# Altium PCB Keo_truot_cua_tu_6_sensor_1_PCB.PcbDoc
Units mil, origin at the board's own origin, x right, y up, seen from the top; angles counter-clockwise.
Board outline 3523.81 x 1301.37 mil, 2 copper layers (Top Layer, Bottom Layer); 37 components, 15 nets, 110 pads, 87 vias.
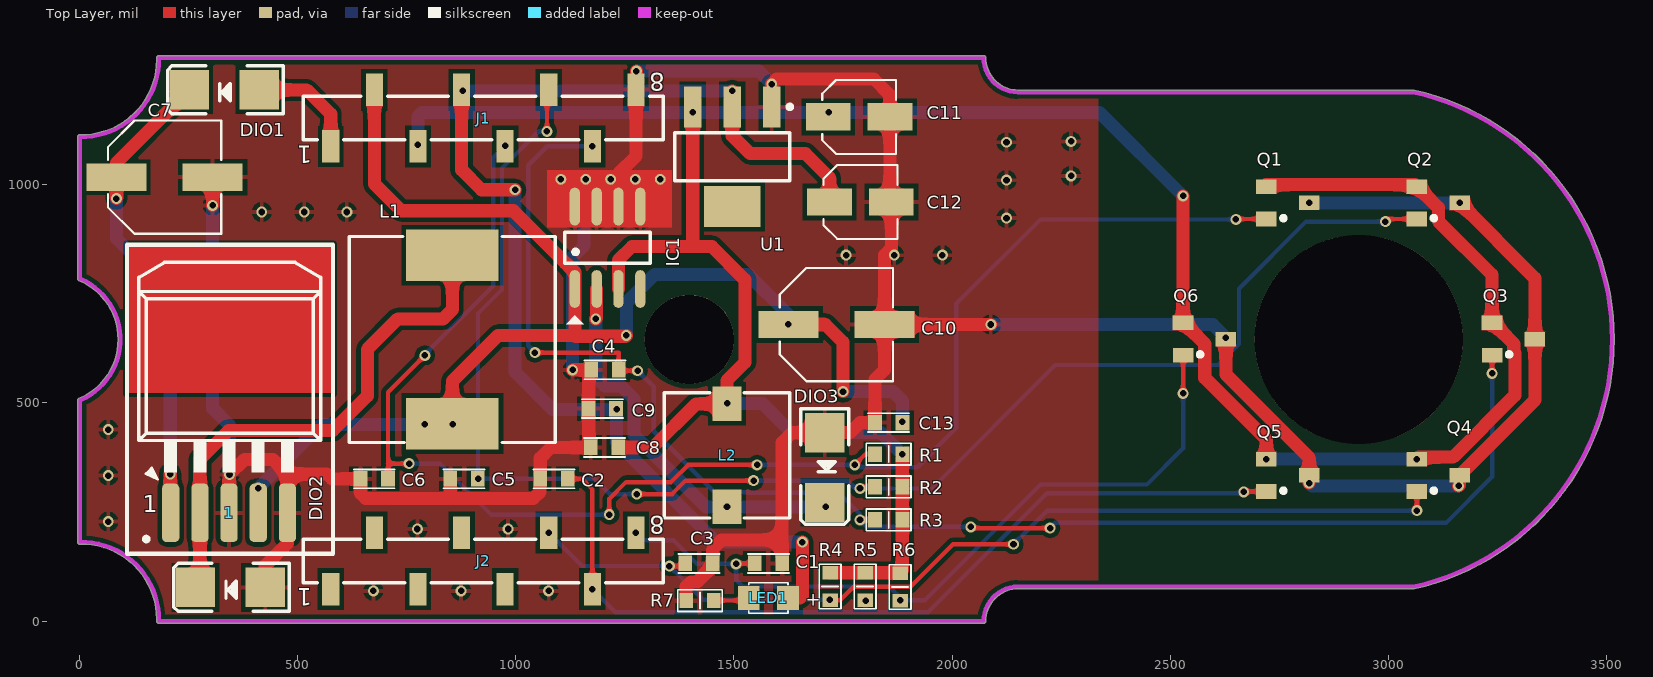
[diagram p0: Top Layer view]
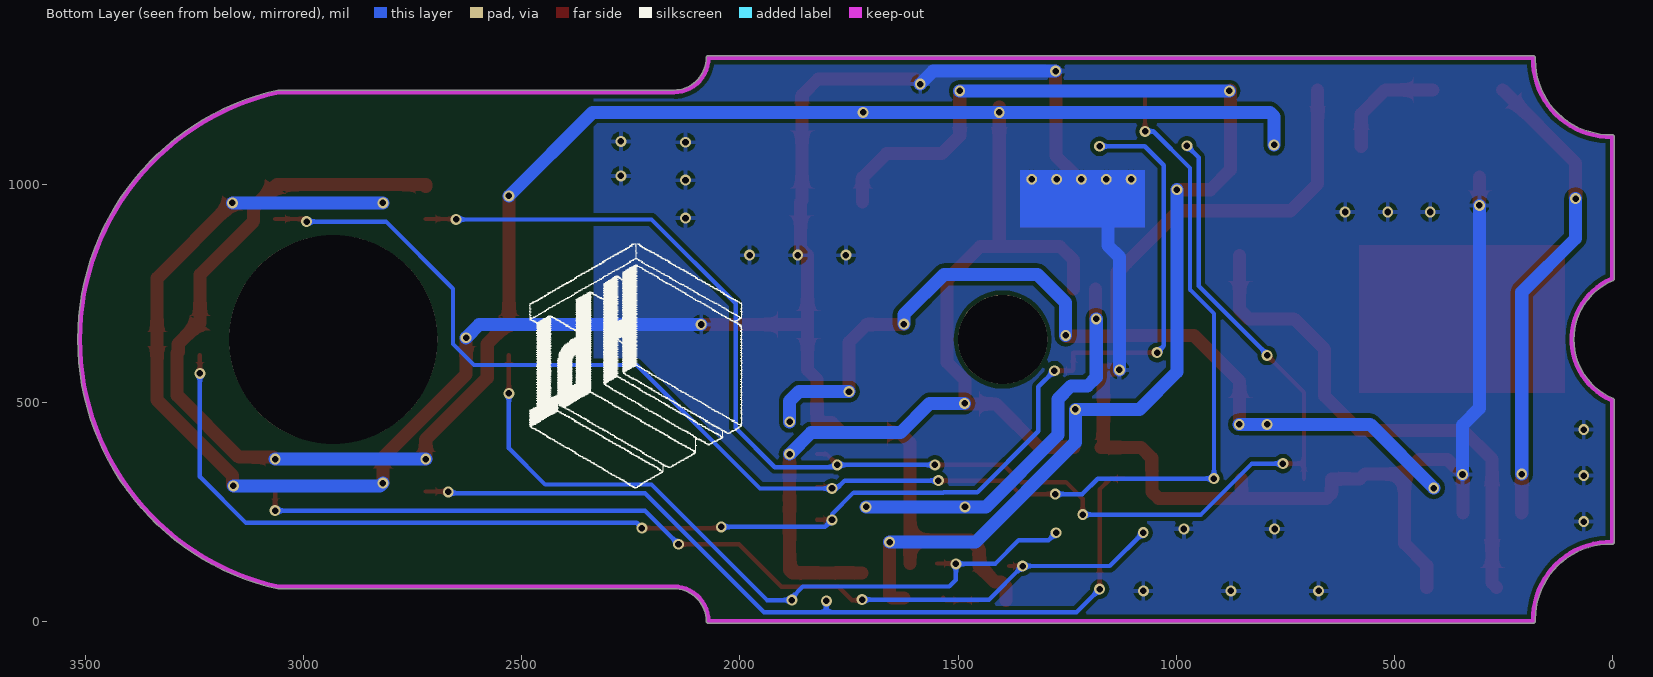
[diagram p1: Bottom Layer view, seen from below]
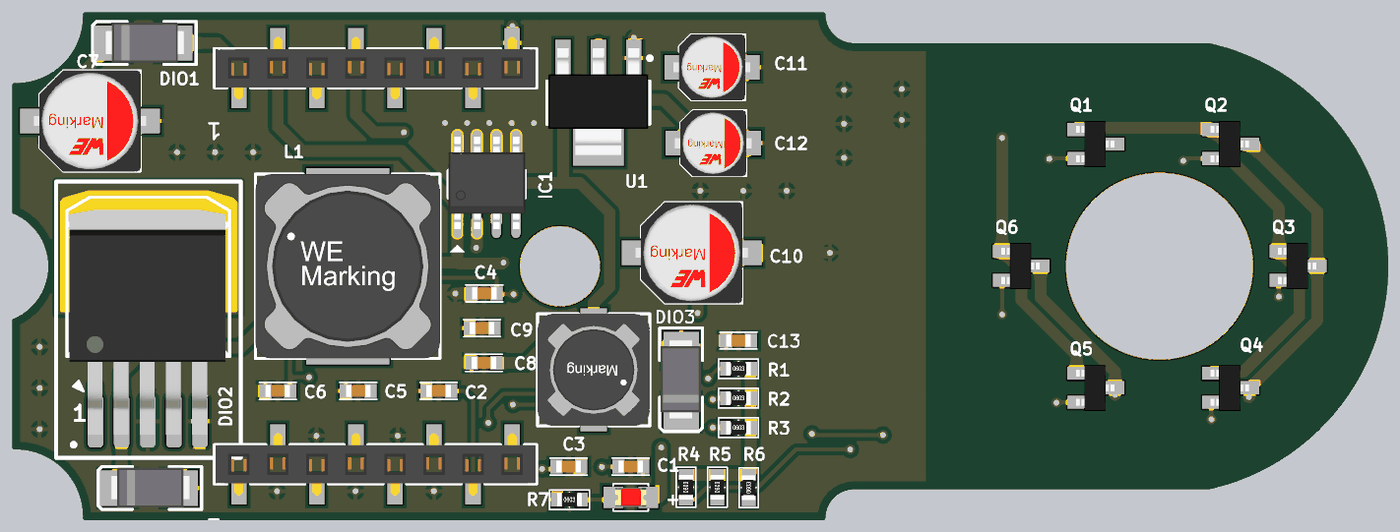
[diagram p2: 3D render of the assembled board from above, using the file's embedded part models]

## Layer stack, top to bottom
Top Solder: solder mask 0.4, Solder Resist, Dk 3.5
Top Layer: signal copper 1.4
Dielectric 1: dielectric 12.6, FR-4, Dk 4.8
Bottom Layer: signal copper 1.4
Bottom Solder: solder mask 0.4, Solder Resist, Dk 3.5

## Board outline
-5.02,181.06 -5.02,506.07 cw(c0,506.07) -1.93,510.7 ccw(c-59.06,645.67) 87.5,645.67 ccw(c-59.06,645.67) -1.93,780.64 cw(c0,785.27) -5.02,785.27 -5.02,1110.28 cw(c0,1110.28) 0.11,1115.29 ccw(c3.94,1287.4) 176.09,1287.4 ccw(c3.94,1287.4) 176.04,1291.23 cw(c181.06,1291.34) 181.06,1296.35 2072.64,1296.35 cw(c2072.64,1291.34) 2077.65,1291.34 ccw(c2151.38,1291.34) 2151.38,1217.61 3058.79,1217.61 cw(c3058.82,1212.6) 3059.91,1217.49 cw(c2933.07,645.67) 3518.79,645.67 cw(c2933.07,645.67) 3059.91,73.84 cw(c3058.82,78.74) 3058.79,73.72 2151.38,73.72 ccw(c2151.38,0) 2077.65,0 cw(c2072.64,0) 2072.64,-5.02 181.06,-5.02 cw(c181.06,0) 176.04,0.11 ccw(c3.94,3.94) 176.09,3.94 ccw(c3.94,3.94) 0.11,176.04 cw(c0,181.06)

## Design rules (kind name [scope] priority, off if disabled: settings)
Clearance [All] p1: gap=10
PolygonConnect [All] p1: connectstyle=Relief reliefconductorwidth=10 reliefentries=4 polygonreliefangle="90 Angle" airgapwidth=10
RoomDefinition Keo_truot_cua_tu_6_sensor_1_schematic [InComponentClass('Keo_truot_cua_tu_6_sensor_1_schematic')] p1: confinementstyle=ConfineIn formatcopy=TRUE lockcomponents=FALSE outline 3546.89,61.52 12001.89,61.52 12001.89,1021.52 3546.89,1021.52
RoutingVias [All] p1: holewidth=15 width=25 viastyle="Through Hole" minholewidth=15 minwidth=25 maxholewidth=28 maxwidth=100
SolderMaskExpansion [All] p1: expansion=4
Width [All] p1: maxlimit=80 minlimit=10 preferedwidth=10
30 further rules are at their usual default settings.

## Components (designator, comment, footprint, x,y, rotation, side; value= is the part's Value field where it differs from the comment)
1 "LM2576" TO263 327,483 r0 top
C1 "104 16V" CAP_0603 1579,132 r180 top
C2 "104 16V" CAP_0603 1087,326 r0 top
C3 "104 16V" CAP_0603 1420,132 r180 top
C4 "104 16V" CAP_0603 1204,576 r0 top
C5 "104 16V" CAP_0603 881,326 r0 top
C6 "104 16V" CAP_0603 675,326 r0 top
C7 "10uF 50V" CAP-ALU-SMD-6.3x7.7x2.2 194,1018 r0 top
C8 "104 16V" CAP_0603 1203,398 r0 top
C9 "104 16V" CAP_0603 1198,487 r0 top
C10 "470uF" CAP-ALU-SMD-6.3x7.7x2.2 1735,680 r0 top
C11 "10uF 16V" CAP-ALU-SMD-4.5x5x1.4 1787,1156 r0 top
C12 "10uF 16V" CAP-ALU-SMD-4.5x5x1.4 1790,961 r0 top
C13 "104 16V" CAP_0603 1854.82,455 r0 top
DIO1 "SS34" DIO-SMD-106 331,1218 r0 top
DIO2 "SS34" DIO-SMD-106 345,77 r0 top
DIO3 "SS34" DIO-SMD-106 1708,352 r90 top
IC1 "xl1509-5V" SO-8 1210,856 r90 top
J1 "61000813321" 61000813321 925.2,1153.54 r180 top
J2 "61000813321" 61000813321 925.2,137.8 r180 top
L1 "100uH" L-SMD-M-12x10 854,645.67 r0 top
L2 "220uH" L-SMD-M-7.3x4.5 1484,380 r0 top
LED1 "LED" LED-0805-Red 1624,53 r180 top
Q1 "DRV5023BI" SOT23B 2770,959 r270 top
Q2 "DRV5023BI" SOT23B 3115,959 r270 top
Q3 "DRV5023BI" SOT23B 3287.72,646.5 r270 top
Q4 "DRV5023BI" SOT23B 3115,334 r270 top
Q5 "DRV5023BI" SOT23B 2770,334 r270 top
Q6 "DRV5023BI" SOT23B 2579.06,646.5 r270 top
R1 "10K" RES_0603 1854.82,382.9 r0 top
R2 "10K" RES_0603 1854.82,307.45 r0 top
R3 "10K" RES_0603 1854.82,232 r0 top
R4 "10K" RES_0603 1720.4,79 r90 top
R5 "10K" RES_0603 1800.7,79 r90 top
R6 "10K" RES_0603 1881,78 r90 top
R7 "1K" RES_0603 1421.91,47 r0 top
U1 "LM1117-3.3V" SOT223 1496,1065 r180 top

## Footprints (in the part's own frame and the unit in brackets; to place one, negate y for a bottom-side part, rotate by r counter-clockwise, add the part's x,y. Pads: shape width x height; smd on the part's side, far side on the other; paste and mask are expansions set on the pad)
61000813321 [mm] "Socket Header, Pitch 2.54 mm, SMT, Vertical, single row, 8p"
  rect 1x1.91 smd: 1(8.89,1.645) 2(6.35,-1.645) 3(3.81,1.645) 4(1.27,-1.645) 5(-1.27,1.645) 6(-3.81,-1.645) 7(-6.35,1.645) 8(-8.89,-1.645)
  silkscreen extent -10.49,-1.28 10.49,1.28, body extent -10.41,-2.03 10.41,2.02, height 7.5
CAP-ALU-SMD-4.5x5x1.4 [mm]
  rect 2.6x1.6 smd: 1(-1.8,0) 2(1.8,0)
  silkscreen extent -2.15,-2.15 2.15,2.15, body extent -2.5,-2.15 2.5,2.15, height 5.45
CAP-ALU-SMD-6.3x7.7x2.2 [mm]
  rect 3.5x1.6 smd: 1(-2.8,0) 2(2.8,0)
  silkscreen extent -3.3,-3.3 3.3,3.3, body extent -3.65,-3.3 3.65,3.3, height 7.65
CAP_0603 [mm]
  rect 0.8x0.9 smd: 1(-0.8,0) 2(0.8,0)
  silkscreen extent -1.2,-0.55 1.2,0.55, body extent -0.8,-0.4 0.8,0.4, height 0.9
DIO-SMD-106 [mil]
  rect 90x90.55 smd: 1(80,0) 2(-80,0)
  silkscreen extent -130,-55 135,55, body extent -99,-50 106,52, height 95
L-SMD-M-7.3x4.5 [mm] "WE-PDA SMD Shielded Power Inductor, 7345"
  rect 1.7x2 smd: 1(0,3) 2(0,-3)
  silkscreen extent -3.65,-3.65 3.65,3.65, body extent -3.65,-3.65 3.65,3.65, height 4.05
L-SMD-M-12x10 [mm] "WE-PDA SMD Shielded Power Inductor, 1210"
  rect 5.4x3 smd: 1(0,4.9) 2(0,-4.9)
  silkscreen extent -6,-6 6,6, body extent -6,-6 6,6, height 9.7
LED-0805-Red [mil]
  rect 50x55 smd: 1(0,0) 2(90,0)
  silkscreen extent 0,-35 90,35, body extent 5,-25 85,25, height 43
RES_0603 [mm]
  rect 0.8x0.9 smd: 1(-0.8,0) 2(0.8,0)
  silkscreen extent -1.3,-0.64 1.3,0.64, body extent -0.8,-0.45 0.8,0.45, height 0.5
SO-8 [mm] "8-Pin Small Outline Integrated Circuit 1.27 mm Pitch, IPC Medium Density"
  oval 2.2x0.6 smd: 1(-2.4,1.905) 2(-2.4,0.635) 3(-2.4,-0.635) 4(-2.4,-1.905) 5(2.4,-1.905) 6(2.4,-0.635) 7(2.4,0.635) 8(2.4,1.905)
  silkscreen extent -4.44,-2.5 0.9,2.5, body extent -2.93,-2.51 3.08,2.49, height 1.75
SOT23B [mm] "SOT 23B"
  rect 0.85x1.2 smd: 1(0.94,-1.245) 2(0,1.25) 3(-0.95,-1.25)
  silkscreen extent 0.77,-0.38 1.02,-0.13, body extent -1.5,-1.3 1.5,1.2, height 1.06
SOT223 [mm]
  rect 1x2.4 smd: 1(-2.3,-2.9) 2(0,-2.9) 3(2.3,-2.9)
  rect 3.3x2.4 smd: 4(0,2.9)
  silkscreen extent -3.48,-3.02 3.35,1.4, body extent -3.25,-3.56 3.25,3.4, height 1.68
TO263 [mm]
  rrect50% 1x3.4 smd: 1(-3.019,-5.969) 2(-1.319,-5.969) 4(2.081,-5.969) 5(3.781,-5.969)
  rrect50% 1x3.4 smd mask+0: 3(0.381,-5.969)
  Top Layer region: -5.568,1.016 6.432,1.016 6.432,9.65 -5.568,9.65
  silkscreen extent -5.57,-8.35 6.43,9.65, body extent -4.73,-6.84 5.43,7.8, height 4.57

## Part data
C1 C2 C3 C4 C5 C6 C8 C9 C13: library part "Capacitor SMD", "Capacitor SMD"
C7 C10 C11 C12: library part CN-ALU-SMD, "Polarized Capacitor (Axial)"
DIO1 DIO2 DIO3: library part "Diode SMD", "Default Diode"
IC1: library part LS1240A, "Electronic Two-Tone Ringer"
J1 J2: "SMT Vertical Socket Header WR-PHD, Pitch 2.54 mm, Single Row, 8 pins"
L1 L2: library part L-SMD-1
LED1: library part "LED SMD"
Q1 Q2 Q3 Q4 Q5 Q6: library part C1815, "hall sensor"
R1 R2 R3 R4 R5 R6 R7: library part "Resistor SMD", "Resistor SMD"
U1: library part LM1117, "800mA Low-Dropout Linear Regulator"

## Free pads (board coordinates)
  round 204.72 hole 204.72: 2(1397.64,645.67)
  round 478.35 hole 478.35: 5(2933.07,645.67)
  round 25 hole 15: 13(1103,1013) 14(1160,1013) 15(1217,1013) 16(1274,1013) 17(1331,1013)

## Via types
v1: diameter 25, hole 15, Top Layer to Bottom Layer, tented both sides, 87 vias

## Nets (pads, with @x,y where several pads share a name; then routed paths per layer and width w, separated by ;. In a path a pad name is that pad's centre, name@x,y a point inside that pad or via, vN(x,y) a via of type N, cw(c..) or ccw(c..) an arc to the next point about the centre after c; other vN are vias at no path point)
3.3V: C9.2 C12.1 J1.4 LED1.1 U1.2 | length 2805.8
  Top Layer w30: J1.4 875.2,1034.8 921,989 v1(998,989) ; v1(1496,1216) U1.2 1496,1113 1537,1072 1664,1072 1719.13,1016.87 C12.1 ; LED1.1 1651,53 1657,59 v1(1657,181)
  Bottom Layer w30: v1(877.5,1216) v1(1496,1216) ; v1(998,989) 998,571 1083.5,485.5 v1(1231,485.5) 1231,410 1460,181 v1(1657,181)
5V: C8.2 C11.1 IC1.3 J1.3 L2.1 Q1.3 Q2.3 Q3.3 Q4.3 Q5.3 Q6.3 R1.2 R2.2 R3.2 R4.2 R5.2 R6.2 U1.3 | length 6339.7
  Top Layer w30: C8.2 1313,398 1413.11,498.11 L2.1 ; IC1.3 1235,828 1266,859 1405,859 ; U1.3 v1(1405.45,1166.55) 1405.45,859.45 1405,859 ; L2.1@1484,499 1484,551.91 1525,592.91 1525,783 1449,859 1405,859 ; R4.2 R5.2 1880,110.5 1886.32,116.81 R3.2 R2.2 v1(1886.32,382.9) ; v1(2529.84,974.84) Q6.3 2531.36,683.9 2579.65,635.62 2579.65,557.79 2720.79,416.64 v1(2720.79,371.4) ; Q1.3 2720.79,1000.73 3061.46,1000.73 Q2.3 3067.31,996.4 3115.59,948.12 3115.59,917.27 3238.5,794.36 Q3.3 3240.02,683.9 3288.31,635.62 3288.31,616.72 3291,614.03 3291,517.36 3149.38,375.73 3070.12,375.73 v1(3065.79,371.4)
  Bottom Layer w30: v1(775,1092) 775,1157 784.55,1166.55 v1(1405.45,1166.55) v1(1717.45,1166.55) 2338.13,1166.55 v1(2529.84,974.84) ; v1(1485,499) 1565,499 1632,432 1837.21,432 v1(1886.32,382.9) ; v1(2720.79,371.4) v1(3065.79,371.4)
12V: 1.4 C10.1 C13.2 IC1.1 J1.2 L1.2 | length 2933.8
  Top Layer w30: J1.2 675.2,1002.8 737,941 994,941 1135,800 IC1.1 1135,655 ; L1.2 854,550 959,655 1135,655 ; v1(1253,655) 1251,653 1137,653 1135,655 ; C10.1 1709.49,680 1750,639.49 v1(1750,526)
  Bottom Layer w30: v1(408.93,304.93) 555,451 v1(791,451) v1(855,451) ; v1(1253,655) 1253,730 1318,795 1532,795 1624,703 v1(1624,680.76) ; v1(1750,526) 1865,526 1886,505 v1(1886,457)
24V: DIO1.1 J1.1 | length 261.1
  Top Layer w30: DIO1.1 520,1218 575.2,1162.8 J1.1
GND: 1.3 1.5 C1.1 C2.1 C3.1 C4.1 C5.1 C6.1 C7.2 C8.1 C9.1 C10.2 C11.2 C12.2 C13.1 DIO2.1 DIO3.1 IC1.5 IC1.6 IC1.7 IC1.8 J1.8 pad.13 pad.14 pad.15 pad.16 pad.17 Q1.2 Q2.2 Q3.2 Q4.2 Q5.2 Q6.2 R7.1 U1.1 | length 7939.6
  Top Layer w30: v1(304.24,953.24) C7.2 ; 1.3 342,335 v1(343,336) 377,370 443,370 475.86,337.14 ; DIO2.1 425,127 475.86,177.86 1.5 475.86,337.14 ; C5.1 849.5,283 847.5,281 ; v1(1130,576) C4.1 1166.5,570 C9.1 1166.5,403 C8.1 1080,398 1055.5,373.5 C2.1 1055.5,296.5 1040,281 847.5,281 ; IC1.6 1235,1026 1275.2,1066.2 J1.8 1276,1219.11 v1(1276,1261.34) ; R7.1 1390.41,78.59 1401.1,89.28 1414.61,89.28 1451.5,126.17 C3.1 1451.5,165.5 1472,186 1610.5,186 ; v1(1586.55,1231.55) 1598,1243 1821,1243 1857.87,1206.13 C11.2 1857.87,964 C12.2 1860.87,854.87 1845.24,839.24 C10.2 ; C1.1 1610.5,186 ; v1(2089,680) C10.2 ; Q6.2 2628.27,565.73 2819.21,374.79 Q5.2 v1(2819.21,316.21) ; v1(3162,310) 3164.21,312.21 Q4.2 3336.93,506.72 Q3.2 3336.93,786.28 v1(3164.21,959) ; 475.86,337.14 566.86,337.14 578,326 C6.1 643.5,292.5 655,281 847.5,281 ; 1610.5,186 1610.5,409.5 1633,432 DIO3.1 1766,432 1789,455 C13.1 1823.32,554.32 1845.24,576.24 C10.2
  Bottom Layer w30: v1(304.24,953.24) 304.24,487.76 343,449 v1(343,336) ; v1(1130,576) 1130,835 1156,861 1156,947 ; v1(1276,1261.34) 1556.76,1261.34 v1(1586.55,1231.55) ; v1(2089,680) 2598,680 v1(2628.27,649.73) ; v1(2819.21,316.21) 2825.43,310 v1(3162,310) ; v1(2819.21,959) v1(3164.21,959)
  other v1: 673,69 874,69 1075,69 774,211 982,211 65,228 65,333.5 65,439 1757,839 1867.5,839 1978,839 2125,924 417,938 514.5,938 612,938 2125,1011 2273,1021 2125,1098 2273,1100
Net1_1: 1.1 C7.1 DIO1.2 | length 1090.8
  Top Layer w30: v1(83.76,968.76) C7.1 83.76,1050.76 DIO1.2 ; v1(207,337) 207,249.14 1.1
  Bottom Layer w30: v1(83.76,968.76) 83.76,877.24 207,754 v1(207,337)
Net1_2: 1.2 DIO2.2 L1.1 | length 1206.5
  Top Layer w30: DIO2.2 275.07,87.07 1.2 275.07,371.07 341,437 580,437 659,516 659,623 729,693 833,693 854,714 L1.1
NetDIO3_2: DIO3.2 IC1.2 L2.2 | length 902.6
  Top Layer w30: v1(1183,693) 1185,695 IC1.2
  Bottom Layer w30: v1(1183,693) 1183,559 1203,539 1241,539 1271,509 1271,426.57 1435.68,261.89 v1(1484,261.89) v1(1710.89,261.89)
NetLED1_2: LED1.2 R7.2 | length 83.1
  Top Layer w10: R7.2 1528,47 LED1.2
O1: C6.2 J1.5 Q1.1 R1.1 | length 3468
  Top Layer w10: C6.2 706.5,361 ; v1(755,361) 706.5,361 ; v1(791,609) 706.5,524.5 706.5,361 ; v1(1214,244) 1214,280 1252.5,318.5 1355.5,318.5 1395,358 v1(1553,358) ; v1(1777,358) 1801.9,382.9 R1.1 ; v1(2651,921) 2652,922 Q1.1
  Bottom Layer w10: v1(755,361) 826,361 943,244 v1(1214,244) ; v1(791,609) 791,611.28 948,768.28 948,1063 v1(975,1090) ; v1(1553,358) v1(1777,358) 1782.1,352.9 1920.1,352.9 2010,442.8 2010,728 2203,921 v1(2651,921)
O2: C5.2 J1.6 Q2.1 R2.1 | length 3524.3
  Top Layer w10: v1(1071,1123) 1071,1214.11 J1.6 ; v1(1277,291) 1358,291 1389,322 v1(1545,322) ; v1(1789,304) 1792.45,307.45 R2.1 ; v1(2994,916) 3000,922 Q2.1
  Bottom Layer w10: v1(1071,1123) 1052,1123 968,1039 968,760 913,705 v1(913,326.5) 1179.5,326.5 1215,291 v1(1277,291) ; v1(1545,322) 1760,322 1778,304 v1(1789,304) 1954,304 2237,587 2610,587 2658.27,635.27 2658.27,762.27 2812,916 v1(2994,916)
O3: C4.2 J1.7 Q3.1 R3.1 | length 3415.6
  Top Layer w10: v1(1043.5,615.5) 1235.5,615.5 C4.2 1237.5,574 v1(1279,574) ; v1(1789,232) R3.1 ; v1(2043,216) 2046,213 v1(2225,213) ; v1(3238.72,567.72) Q3.1
  Bottom Layer w10: v1(1043.5,615.5) 1028,631 1028,1045 1071.78,1088.78 v1(1175.2,1088.78) ; v1(1279,574) 1316,537 1316,435 1456,295 1533.11,295 1533.61,294.5 1739.5,294.5 1789,245 v1(1789,232) 1805,216 v1(2043,216) ; v1(2225,213) 2237,225 3133,225 3238.72,330.72 v1(3238.72,567.72)
O4: C3.2 J2.6 Q4.1 R4.1 | length 2213.6
  Top Layer w10: v1(1352,126) C3.2@1382.5,126 ; R4.1 1743.03,47.5 1774.27,78.75 1904.93,78.75 2002.18,176 v1(2141,176) ; v1(3066,253) Q4.1
  Bottom Layer w10: v1(1075.2,202.56) 1151.76,126 v1(1352,126) 1429,49 v1(1720,49) ; v1(2141,176) 2218,253 v1(3066,253)
O5: C2.2 J2.7 Q5.1 R5.1 | length 2004.2
  Top Layer w10: C2.2 1151,326 1175.2,301.8 v1(1175.2,73.03) ; v1(2669,296) 2670,297 Q5.1
  Bottom Layer w10: v1(1175.2,73.03) 1228.23,20 1802,20 ; v1(1802,46.2) 1802,20 ; v1(2669,296) 2666,293 2218,293 1945,20 1802,20
O6: C1.2 J2.8 Q6.1 R6.1 | length 1745
  Top Layer w10: v1(1275,202.36) J2.8 ; v1(1505,131) 1506,132 C1.2 ; v1(2530,522) 2530,609.44 Q6.1
  Bottom Layer w10: v1(1275,202.36) 1292.36,185 1361,185 1415,131 v1(1505,131) 1505,94 1520,79 1856,79 1881,54 v1(1881,48) 1938,48 2203,313 2447,313 2530,396 v1(2530,522)
pads on no net: IC1.4 J2.1 J2.2 J2.3 J2.4 J2.5 U1.4

## Polygon pours and split planes (outlines as drawn)
GND on Top Layer "GND_L01_P000" (solid, remove dead copper, pour order 0): 0,1110.28 0,1191.34 cw(c100,1191.34) 100,1291.34 2072.64,1291.34 2235,1291.34 cw(c2235,1191.34) 2335,1191.34 2335,75 cw(c2260,75) 2260,0 181.06,0 100,0 cw(c100,100) 0,100 0,181.06
GND on Bottom Layer "GND_L02_P002" (solid, remove dead copper, pour order 2): 0,1110.28 0,1191.34 cw(c100,1191.34) 100,1291.34 2072.64,1291.34 2235,1291.34 cw(c2235,1191.34) 2335,1191.34 2335,78.74 cw(c2256.26,78.74) 2256.26,0 181.06,0 100,0 cw(c100,100) 0,100 0,181.06

## Keep-outs
Keep-Out Layer:
  lines w10: 2190.75,78.74 3058.82,78.74 ccw(c2933.07,645.67) 3058.82,1212.6 2230.12,1212.6 2151.38,1212.6 cw(c2151.38,1291.34) 2072.64,1291.34 181.06,1291.34 cw(c3.94,1287.4) 0,1110.28 0,785.27 cw(c-59.06,645.67) 0,506.07 0,181.06 cw(c3.94,3.94) 181.06,0 2072.64,0 cw(c2151.38,0) 2151.38,78.74 2230.12,78.74

## Other copper
Top Layer:
  rectangle net GND: 1071,903 1358,1034
Bottom Layer:
  rectangle net GND: 1071,903 1358,1034

## Silkscreen, mask and mechanical layers (free items; w line width, h text height)
Top Overlay:
  text "+" at 1665,35 h30
Bottom Overlay:
  drawing of 2328 lines, arcs and shapes, not listed

## Text inside footprints (layer, text, board x,y; h text height)
J1: Top Overlay "8" at 1341.73,1255.91 h40 r180; Top Overlay "1" at 532.28,1090.55 h40 r180
J2: Top Overlay "8" at 1341.73,240.16 h40 r180; Top Overlay "1" at 532.28,74.8 h40 r180